# Altium PCB TL203蓝牙主板20529.PcbDoc (part 3 of 3)
Units mil, origin at the board's own origin, x right, y up, seen from the top; angles counter-clockwise.
Board outline 2775 x 2250 mil, 2 copper layers (Top Layer, Bottom Layer); 102 components, 86 nets, 328 pads, 438 vias.
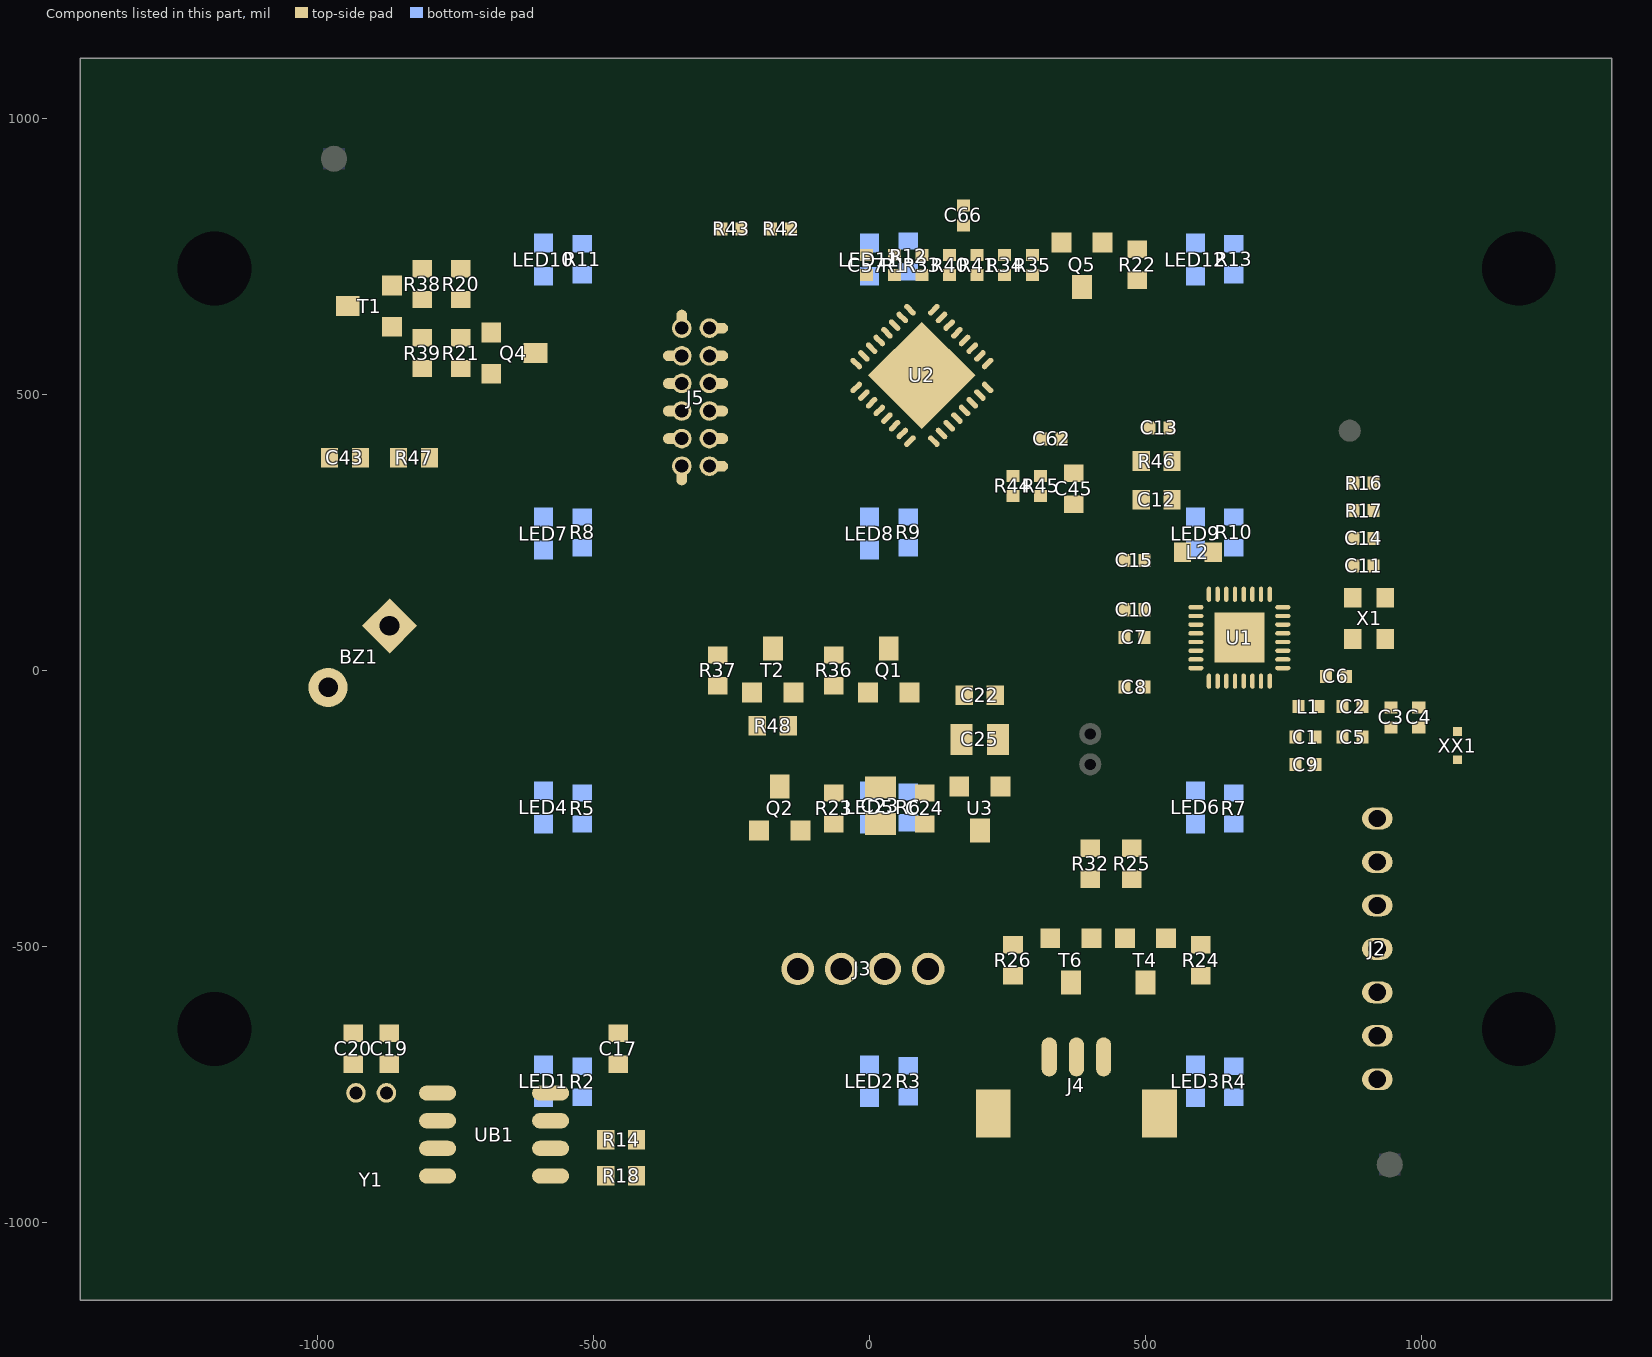
[diagram p3: the components of this part, seen from the top]

## Silkscreen, mask and mechanical layers (free items; w line width, h text height) (continued)
Mechanical 3:
  lines w5: -1294.33,-959.68 1284.42,-959.68 ; -305.14,467.11 -285.45,467.11 -285.45,486.8 -305.14,486.8 ; -285.45,663.96 -305.14,663.96 -305.14,683.65 -285.45,683.65 ; -654.56,-762.82 -654.56,-644.71 -615.19,-644.71 -615.19,-762.82 -654.56,-762.82 ; -654.56,-270.7 -654.56,-152.59 -615.19,-152.59 -615.19,-270.7 -654.56,-270.7 ; -654.56,221.43 -654.56,339.54 -615.19,339.54 -615.19,221.43 -654.56,221.43 ; -654.56,713.55 -654.56,831.66 -615.19,831.66 -615.19,713.55 -654.56,713.55 ; -378.96,342.9 -378.96,710.22 -260.85,710.22 -260.85,342.9 -378.96,342.9 ; -354.35,368.69 -354.35,388.37 -334.66,388.37 -334.66,368.69 -354.35,368.69 ; -354.35,417.9 -354.35,437.59 -334.66,437.59 -334.66,417.9 -354.35,417.9 ; -354.35,467.11 -354.35,486.8 -334.66,486.8 -334.66,467.11 -354.35,467.11 ; -354.35,516.33 -354.35,536.01 -334.66,536.01 -334.66,516.33 -354.35,516.33 ; -354.35,565.54 -354.35,585.22 -334.66,585.22 -334.66,565.54 -354.35,565.54 ; -354.35,614.75 -354.35,634.44 -334.66,634.44 -334.66,614.75 -354.35,614.75 ; -354.35,663.96 -354.35,683.65 -334.66,683.65 -334.66,663.96 -354.35,663.96 ; -305.14,368.69 -305.14,388.37 -285.45,388.37 -285.45,368.69 -305.14,368.69 ; -305.14,417.9 -305.14,437.59 -285.45,437.59 -285.45,417.9 -305.14,417.9 ; -305.14,516.33 -305.14,536.01 -285.45,536.01 -285.45,516.33 -305.14,516.33 ; -305.14,565.54 -305.14,585.22 -285.45,585.22 -285.45,565.54 -305.14,565.54 ; -305.14,614.75 -305.14,634.44 -285.45,634.44 -285.45,614.75 -305.14,614.75 ; -24.64,-762.82 -24.64,-644.71 14.73,-644.71 14.73,-762.82 -24.64,-762.82 ; -24.64,-270.7 -24.64,-152.59 14.73,-152.59 14.73,-270.7 -24.64,-270.7 ; -24.64,221.43 14.73,221.43 14.73,339.54 -24.64,339.54 -24.64,221.43 ; -24.64,713.55 14.73,713.55 14.73,831.66 -24.64,831.66 -24.64,713.55 ; 605.28,-762.82 605.28,-644.71 644.65,-644.71 644.65,-762.82 605.28,-762.82 ; 605.28,-270.7 644.65,-270.7 644.65,-152.59 605.28,-152.59 605.28,-270.7 ; 605.28,221.43 644.65,221.43 644.65,339.54 605.28,339.54 605.28,221.43 ; 605.28,713.55 644.65,713.55 644.65,831.66 605.28,831.66 605.28,713.55
  text "3" at -655,750 h50
  text "2" at -25,750 h50
  text "1" at 615,750 h50
  text "6" at -650,260 h50
  text "5" at -20,260 h50
  text "4" at 605,255 h50
  text "9" at -655,-235 h50
  text "8" at -25,-235 h50
  text "7" at 610,-240 h50
  text "*" at 610,-725 h50
  text "#" at -650,-730 h50
  text "0" at -20,-730 h50

## Dimensions
-1294.33,-1065.59 to 1284.41,-1065.59 on Mechanical 1
-1104.96,1028.5 to -1319.96,-1048.27 on Mechanical 1